# Altium PCB DDS.PcbDoc
Units mm, origin at the board's own origin, x right, y up, seen from the top; angles counter-clockwise.
Board outline 71 x 92 mm, 4 copper layers (Top Layer, Signal Layer 1, Signal Layer 2, Bottom Layer), stack 0.778 mm thick; 120 components, 69 nets, 365 pads, 91 vias.
Unrouted connection lines stored in the file: 89.
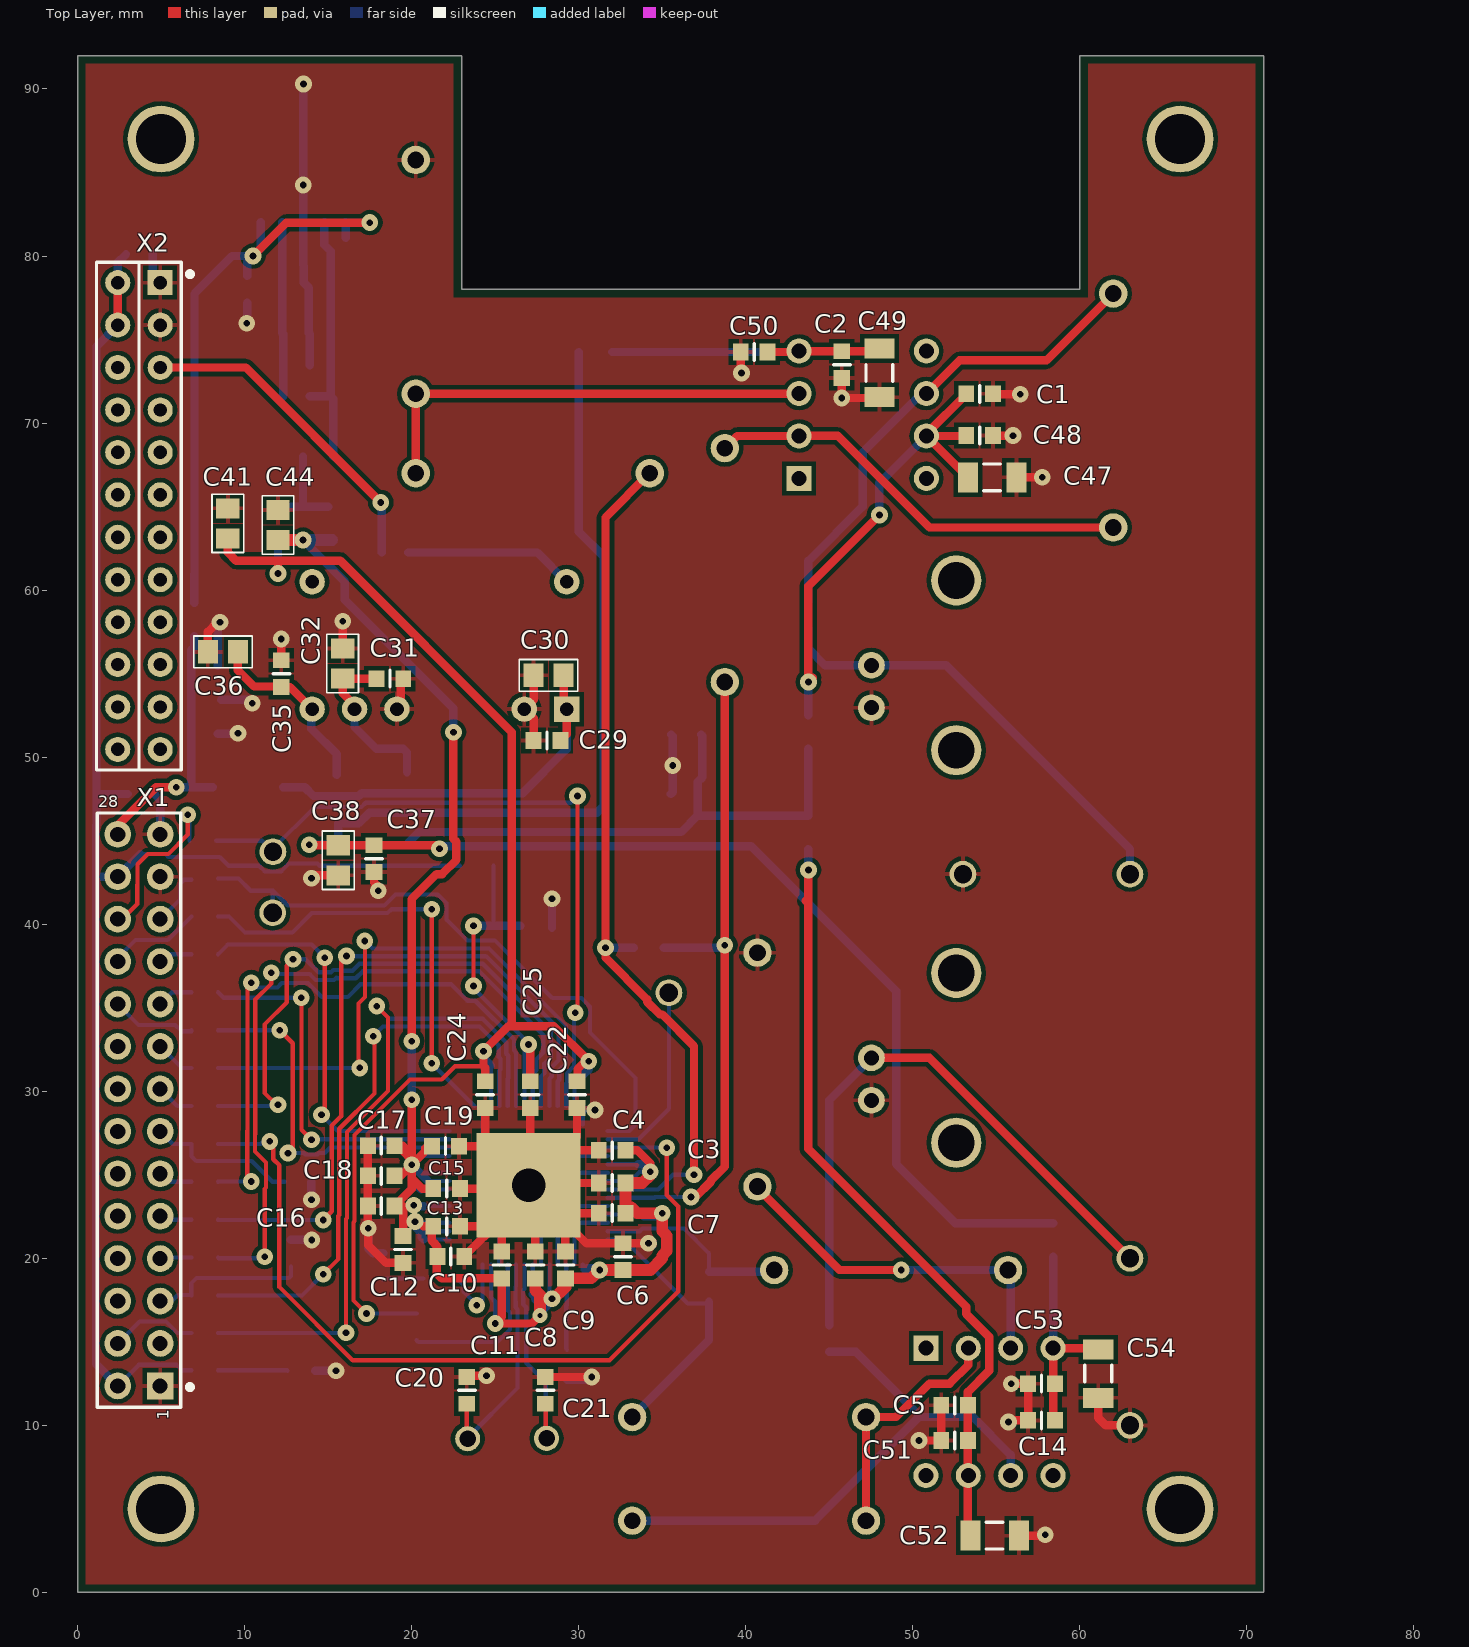
[diagram p0: Top Layer view]
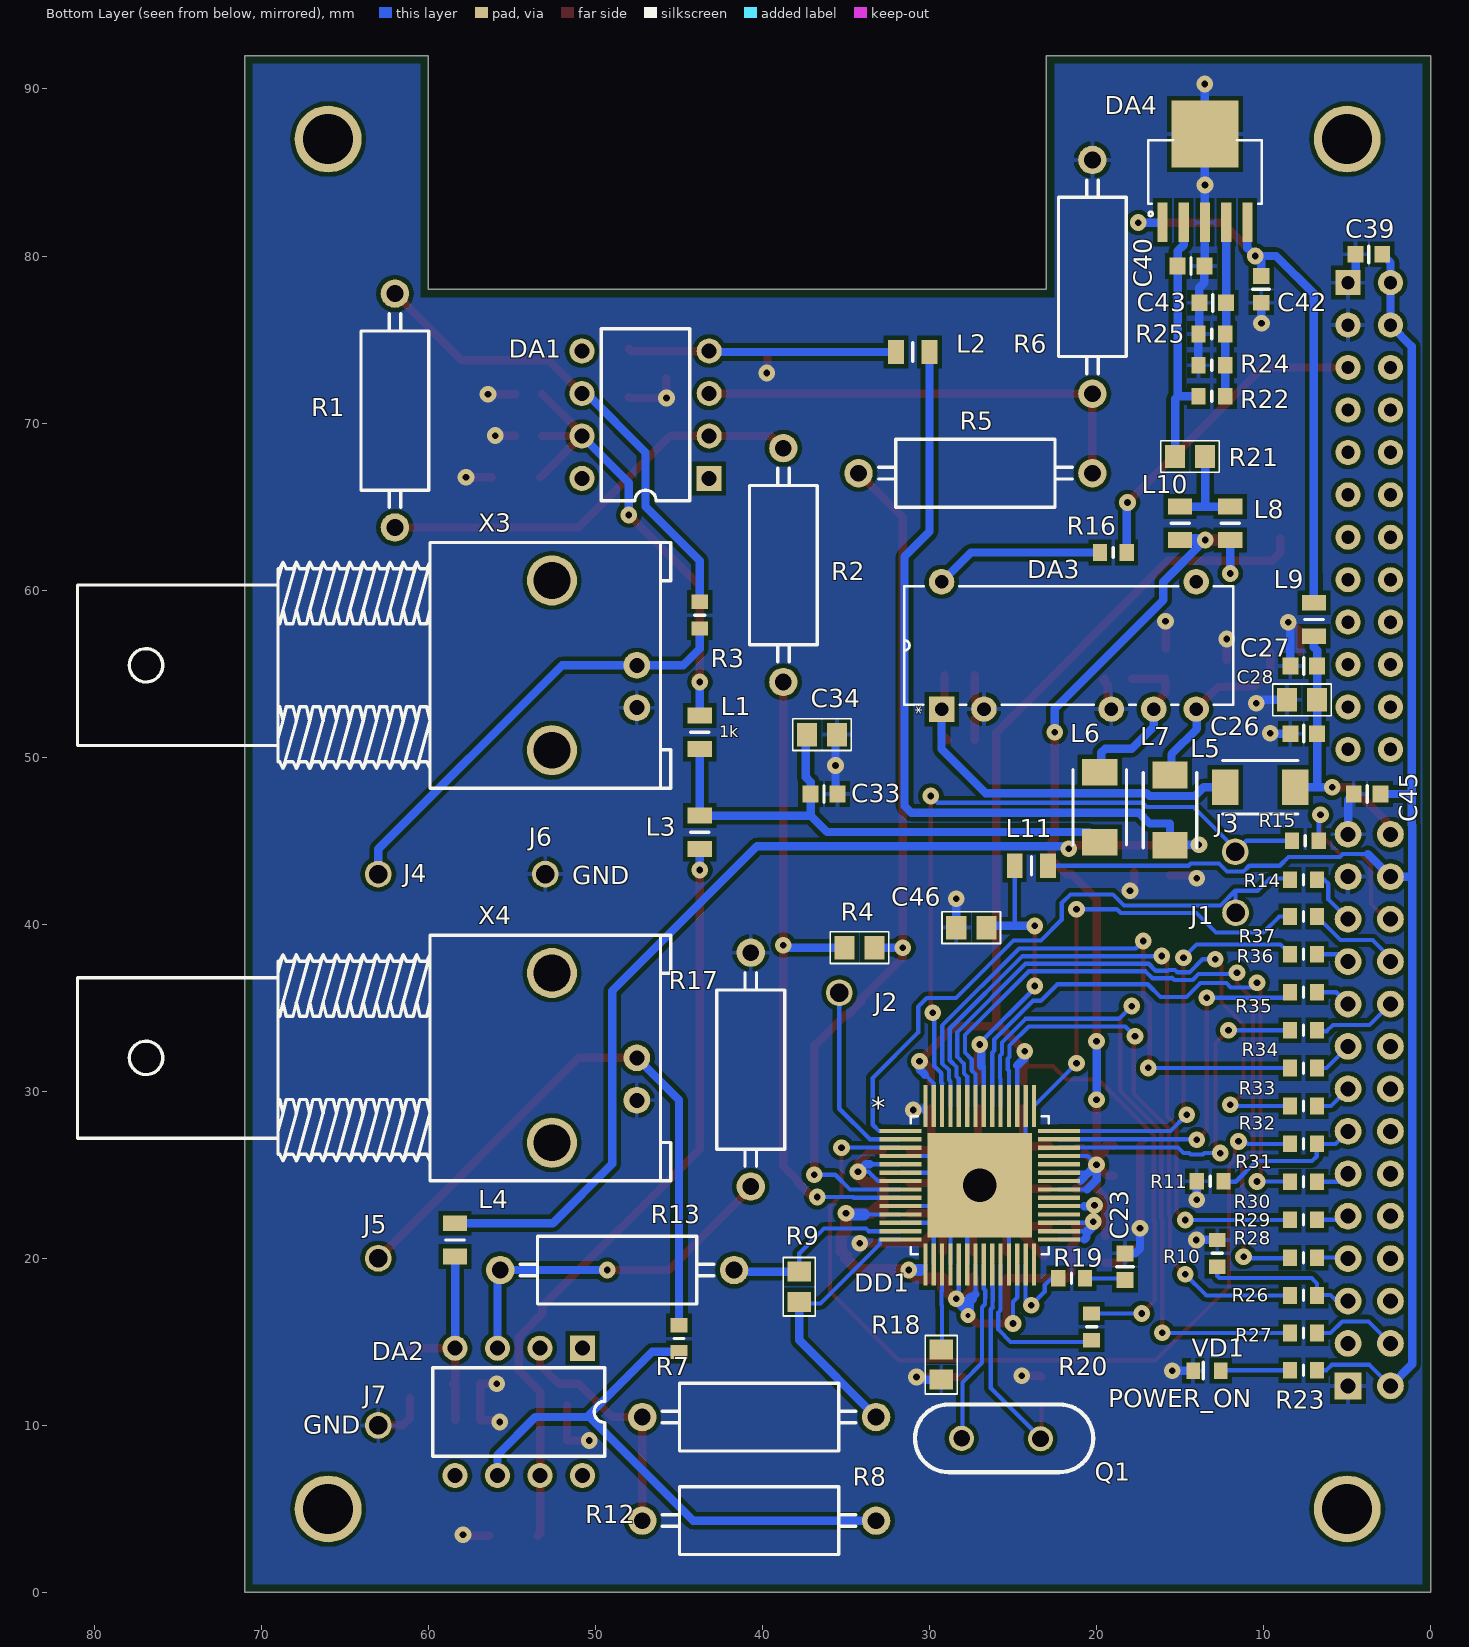
[diagram p1: Bottom Layer view, seen from below]
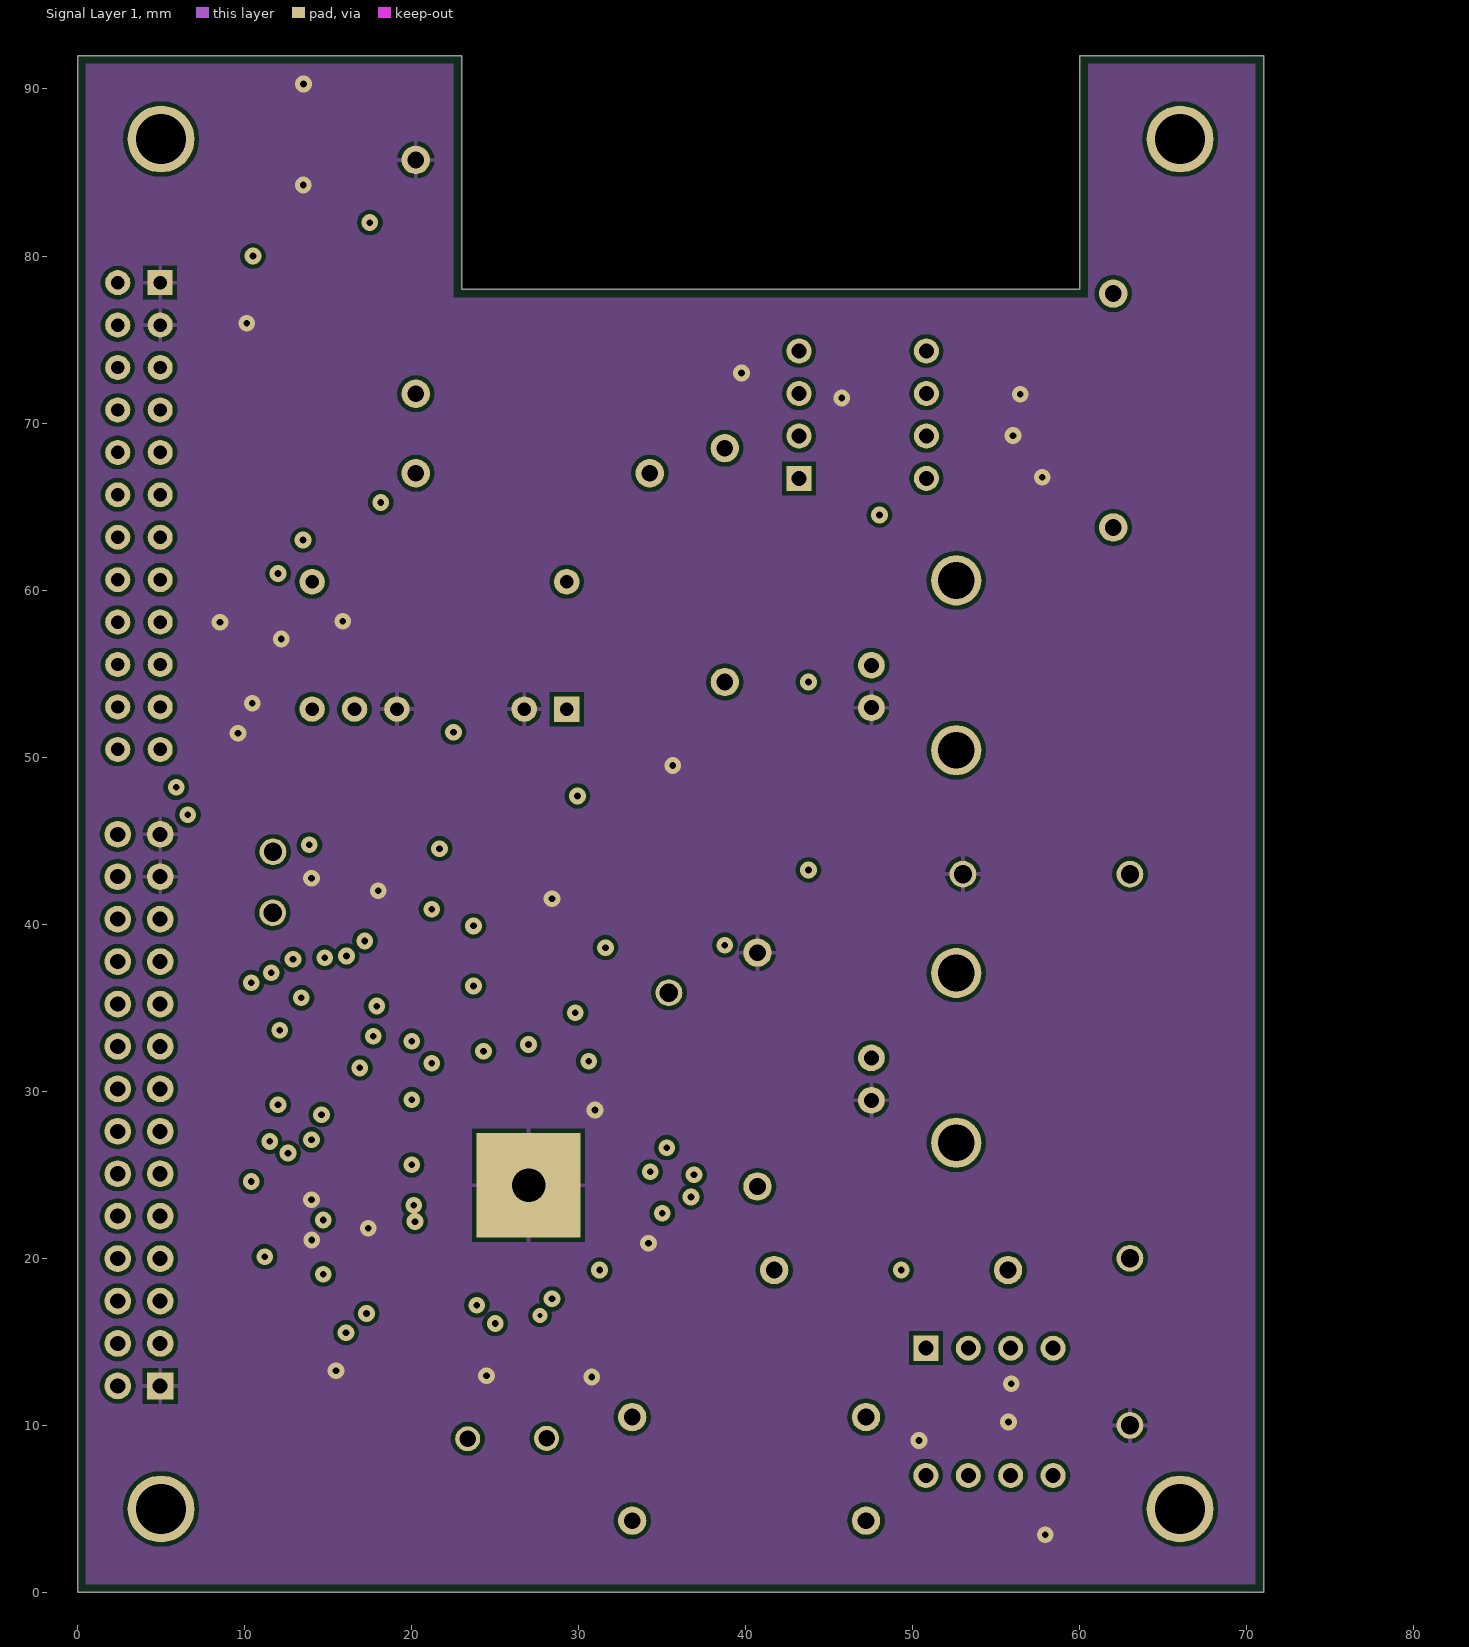
[diagram p2: Signal Layer 1]
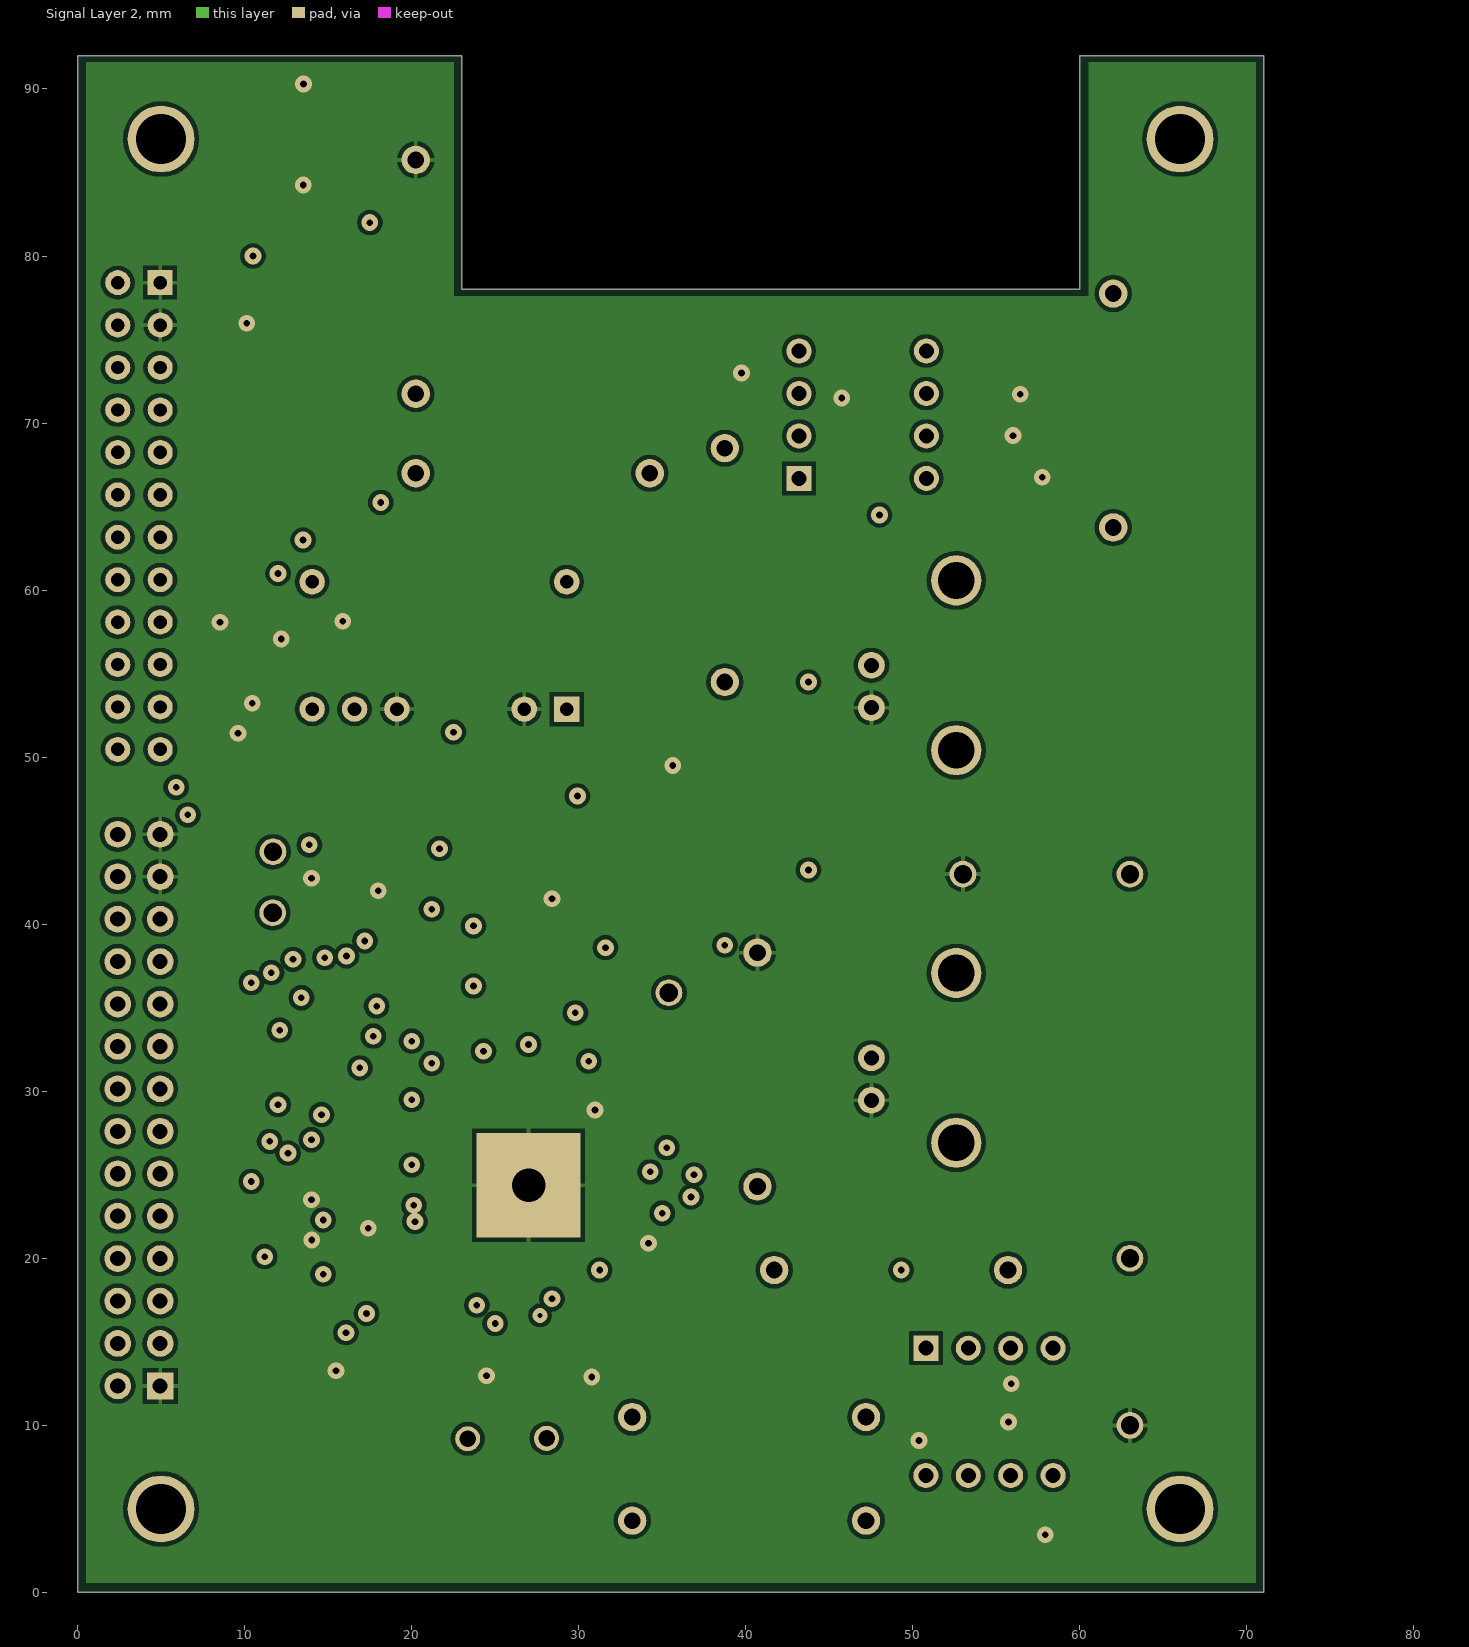
[diagram p3: Signal Layer 2]

## Layer stack, top to bottom
Top Solder: solder mask 0.0102, Solder Resist, Dk 3.5
Top Layer: signal copper 0.0356
Dielectric 1: core 0.254, FR-4, Dk 4.2
Signal Layer 1: signal copper 0.036
Dielectric 3: prepreg 0.127, Dk 4.2
Signal Layer 2: signal copper 0.036
Dielectric 2: core 0.254, Dk 4.2
Bottom Layer: signal copper 0.0356
Bottom Solder: solder mask 0.0102, Solder Resist, Dk 3.5

## Board outline
0,0 0,92 23,92 23,78 60,78 60,92 71,92 71,0

## Design rules (kind name [scope] priority, off if disabled: settings)
Clearance TopOverlay [OnLayer('Top Overlay') vs OnLayer('Top Layer')] p1: gap=0 ignorepadtopadclearanceinfootprint=FALSE except(0.254: Arc-Text Track-Text SMDPad-Text Via-Text Text-Text Text-Hole)
Clearance MultyBot [OnLayer('Bottom Layer') vs OnLayer('Multi-Layer')] p2: gap=0.254 ignorepadtopadclearanceinfootprint=FALSE except(0: Arc-Hole Track-Hole SMDPad-Hole THPad-Hole Via-Hole Fill-Hole Poly-Hole Region-Hole Text-Hole; 0.15: SMDPad-SMDPad; 0.2: Arc-Arc Arc-Track Arc-SMDPad Track-Track Track-SMDPad)
Clearance MultyTop [OnLayer('Multi-Layer')] p3: gap=0.254 ignorepadtopadclearanceinfootprint=FALSE except(0: Arc-Hole Track-Hole SMDPad-Hole THPad-Hole Via-Hole Fill-Hole Poly-Hole Region-Hole Text-Hole; 0.15: SMDPad-SMDPad; 0.2: Arc-Arc Arc-Track Arc-SMDPad Track-Track Track-SMDPad)
Clearance MulyMulty [OnLayer('Multi-Layer') vs OnLayer('Multi-Layer')] p4: gap=0.254 ignorepadtopadclearanceinfootprint=FALSE except(0: Arc-Hole Track-Hole SMDPad-Hole THPad-Hole Via-Hole Fill-Hole Poly-Hole Region-Hole Text-Hole; 0.2: Arc-Arc Arc-Track Arc-SMDPad Track-Track Track-SMDPad SMDPad-SMDPad)
Clearance TopTop [OnLayer('Top Layer') vs OnLayer('Top Layer')] p5: gap=0.254 ignorepadtopadclearanceinfootprint=FALSE except(0: Arc-Hole Track-Hole SMDPad-Hole THPad-Hole Via-Hole Fill-Hole Poly-Hole Region-Hole Text-Hole; 0.2: Arc-Arc Arc-Track Arc-SMDPad Track-Track Track-SMDPad SMDPad-SMDPad)
Clearance BotBot [OnLayer('Bottom Layer') vs OnLayer('Bottom Layer')] p6: gap=0.254 ignorepadtopadclearanceinfootprint=FALSE except(0: Arc-Hole Track-Hole SMDPad-Hole THPad-Hole Via-Hole Fill-Hole Poly-Hole Region-Hole Text-Hole; 0.15: SMDPad-SMDPad; 0.2: Arc-Arc Arc-Track Arc-SMDPad Track-Track Track-SMDPad)
HoleSize [All] p1: absolutevalues=TRUE maxlimit=4 minlimit=0.025 maxpercent=80.000 minpercent=20.000
PlaneConnect [All] p1: pad.planeconnectstyle=Relief pad.reliefexpansion=0.508 pad.reliefentries=4 pad.reliefconductorwidth=0.254 pad.reliefairgap=0.254 via.planeconnectstyle=Direct via.reliefexpansion=0.508 via.reliefentries=4 via.reliefconductorwidth=0.254 via.reliefairgap=0.254
PolygonConnect [All] p1: thpad.connectstyle=Relief thpad.reliefconductorwidth=0.254 thpad.reliefentries=4 thpad.polygonreliefangle="90 Angle" thpad.airgapwidth=0.254 smdpad.connectstyle=Relief smdpad.reliefconductorwidth=0.254 smdpad.reliefentries=4 smdpad.polygonreliefangle="90 Angle" smdpad.airgapwidth=0.254 via.connectstyle=Direct via.reliefconductorwidth=0.254 via.reliefentries=4 via.polygonreliefangle="90 Angle" via.airgapwidth=0.254
RoutingVias [All] p1: holewidth=0.4 width=1 viastyle="Through Hole" minholewidth=0.3 minwidth=0.9 maxholewidth=0.4 maxwidth=1
SolderMaskExpansion [All] p1: expansion=0.102
Width [All] p1: maxlimit=0.7 minlimit=0.2 preferedwidth=0.254 midlayer1_minwidth=0.254 midlayer1_maxwidth=0.254 midlayer2_minwidth=0.254 midlayer2_maxwidth=0.254 minimp=50.000000 maximp=50.000000 favimp=50.000000
28 further rules are at their usual default settings.

## Components (designator, comment, footprint, x,y, rotation, side; value= is the part's Value field where it differs from the comment)
C1 "100nF" CAPC1608X87N 54,71.75 r180 top
C2 "100nF" CAPC1608X87N 45.75,73.5 r90 top
C3 "100nF" CAPC1608X87N 31.998,24.509 r180 top
C4 "100nF" CAPC1608X87N 31.998,26.462 r180 top
C5 "100nF" CAPC1608X87N 52.5,11.2 r0 top
C6 "100nF" CAPC1608X87N 32.65,20.1 r90 top
C7 "100nF" CAPC1608X87N 31.998,22.704 r180 top
C8 "100nF" CAPC1608X87N 27.4,19.604 r90 top
C9 "100nF" CAPC1608X87N 29.204,19.604 r90 top
C10 "100nF" CAPC1608X87N 22.346,20.112 r0 top
C11 "100nF" CAPC1608X87N 25.394,19.604 r90 top
C12 "100nF" CAPC1608X87N 19.488,20.529 r270 top
C13 "100nF" CAPC1608X87N 22.092,21.916 r0 top
C14 "100nF" CAPC1608X87N 57.7,10.3 r0 top
C15 "100nF" CAPC1608X87N 22.092,24.176 r0 top
C16 "100nF" CAPC1608X87N 18.18,23.134 r180 top
C17 "100nF" CAPC1608X87N 18.18,26.742 r180 top
C18 "100nF" CAPC1608X87N 18.18,24.938 r180 top
C19 "100nF" CAPC1608X87N 22.028,26.716 r0 top
C20 "39pF" CAPC1608X87N 23.3,12.1 r270 top
C21 "39pF" CAPC1608X87N 28,12.1 r270 top
C22 "100nF" CAPC1608X87N 29.9,29.8 r270 top
C23 "680pF" CAPC1608X87N 18.3,19.5 r270 bottom
C24 "100nF" CAPC1608X87N 24.4,29.8 r270 top
C25 "100nF" CAPC1608X87N 27.1,29.8 r270 top
C26 "100nF" CAPC1608X87N 7.6,51.404 r180 bottom
C27 "100nF" CAPC1608X87N 7.6,55.463 r180 bottom
C28 "10uF" SMD0805CAP 8.702,53.432 r180 bottom
C29 "100nF" CAPC1608X87N 28.1,51 r0 top
C30 "10uF" SMD0805CAP 27.198,54.898 r0 top
C31 "100nF" CAPC1608X87N 18.7,54.7 r180 top
C32 "10uF" SMD0805CAP 15.869,56.602 r270 top
C33 "100nF" CAPC1608X87N 36.316,47.798 r0 bottom
C34 "10uF" SMD0805CAP 35.43,51.356 r0 bottom
C35 "100nF" CAPC1608X87N 12.2,55 r270 top
C36 "10uF" SMD0805CAP 7.698,56.298 r0 top
C37 "100nF" CAPC1608X87N 17.75,43.925 r90 top
C38 "10uF" SMD0805CAP 15.606,42.827 r90 top
C39 "100nF" CAPC1608X87N 3.7,80.1 r180 bottom
C40 "100nF" CAPC1608X87N 14.35,79.4 r0 bottom
C41 "0.1uF" SMD0805CAP 9,65 r270 top
C42 "100nF" CAPC1608X87N 10.15,78 r90 bottom
C43 "10nF" CAPC1608X87N 13.05,77.2 r180 bottom
C44 "0.1uF" SMD0805CAP 11.998,64.902 r270 top
C45 "100nF" CAPC1608X87N 3.804,47.798 r180 bottom
C46 "20.0uF" SMD0805CAP 28.502,39.798 r180 bottom
C47 "10uF" CAPC1206 54.75,66.75 r180 top
C48 "1nF" CAPC1608X87N 54,69.25 r180 top
C49 "10uF" CAPC1206 48,73 r90 top
C50 "1nF" CAPC1608X87N 40.5,74.25 r0 top
C51 "1nF" CAPC1608X87N 52.5,9.1 r180 top
C52 "10uF" CAPC1206 54.9,3.4 r0 top
C53 "1nF" CAPC1608X87N 57.7,12.5 r180 top
C54 "10uF" CAPC1206 61.1,13.1 r270 top
DA1 "LM6171" DIP8-300 47,70.5 r0 bottom
DA2 "LM6171" DIP8-300 54.59,10.81 r270 bottom
DA3 "DCP010507" NVA7 14.041,60.498 r90 bottom
DA4 "REG104GA3V3" SOT223_6-127 13.512,85.02 r180 bottom value=3V3
DD1 "AD9958BCPZ" CP_56_1_ADI-M 26.997,24.378 r180 bottom
J1 "PLS1" PLS1 11.678,40.686 r180 bottom
J2 "PLS1" PLS1 35.4,35.9 r180 bottom
J3 "PLS1" PLS1 11.7,44.336 r180 bottom
J4 "PLS1" PLS1 63,43 r180 bottom
J5 "PLS1" PLS1 63,20 r180 bottom
J6 "PLS1" PLS1 53,43 r180 bottom
J7 "PLS1" PLS1 63,10 r180 bottom
L1 "1k" RESC2012X50N 43.75,51.5 r90 bottom
L2 "1k" RESC2012X50N 31,74.25 r0 bottom
L3 "1k" RESC2012X50N 43.75,45.5 r270 bottom
L4 "1k" RESC2012X50N 58.4,21.1 r270 bottom
L5 "INDM4532X340N" INDM4532X340N 10.2,48.2 r0 bottom
L6 "INDM4532X340N" INDM4532X340N 19.809,47 r270 bottom
L7 "INDM4532X340N" INDM4532X340N 15.604,46.829 r270 bottom
L8 "1k" RESC2012X50N 12,64 r270 bottom
L9 "1k" RESC2012X50N 6.99,58.242 r90 bottom
L10 "1k" RESC2012X50N 15,64 r270 bottom
L11 "1k" RESC2012X50N 23.9,43.5 r0 bottom
Q1 "KX-3HT  25 MHz" HC49_S 28.079,9.225 r270 bottom
R1 "?" RES_VISHAY_CMF60 62,70.75 r90 bottom
R2 "?" RES_VISHAY_CMF60 38.75,61.5 r90 bottom
R3 "51" RESC1608X64N 43.75,58.5 r90 bottom
R4 "100" SMD0805RES 33.198,38.602 r0 bottom
R5 "?" RES_VISHAY_CMF60 27.25,67 r180 bottom
R6 "?" RES_VISHAY_CMF60 20.25,78.75 r90 bottom
R7 "?" RES_VISHAY_CMF60 40.2,10.5 r0 bottom
R8 "?" RES_VISHAY_CMF60 40.2,4.3 r180 bottom
R9 "100" SMD0805RES 37.802,19.302 r270 bottom
R10 "10k" RESC1608X64N 12.775,20.3 r270 bottom
R11 "10k" RESC1608X64N 13.2,24.607 r180 bottom
R12 "51" RESC1608X64N 45,15.2 r270 bottom
R13 "?" RES_VISHAY_CMF60 48.7,19.3 r0 bottom
R14 "1k" RESC1608X64N 7.614,42.658 r180 bottom (schematic designator R38)
R15 "1k" RESC1608X64N 7.5,45 r180 bottom (schematic designator R39)
R16 "1k" RESC1608X64N 19,62.25 r180 bottom (schematic designator R40)
R17 "?" RES_VISHAY_CMF60 40.7,31.3 r90 bottom
R18 "1k91" SMD0805RES 29.298,12.633 r90 bottom
R19 "680" RESC1608X64N 21.5,18.8 r0 bottom
R20 "10k" RESC1608X64N 20.3,15.9 r90 bottom
R21 "0" SMD0805RES 15.402,67.998 r180 bottom
R22 "10k" RESC1608X64N 13.1,71.6 r0 bottom
R23 "3k" RESC1608X64N 7.614,13.306 r180 bottom
R24 "51k" RESC1608X64N 13.1,73.467 r180 bottom
R25 "51k" RESC1608X64N 13.1,75.333 r180 bottom
R26 "1k" RESC1608X64N 7.614,17.781 r180 bottom
R27 "1k" RESC1608X64N 7.614,15.531 r180 bottom
R28 "1k" RESC1608X64N 7.614,20.044 r180 bottom
R29 "1k" RESC1608X64N 7.614,22.313 r180 bottom
R30 "1k" RESC1608X64N 7.614,24.582 r180 bottom
R31 "1k" RESC1608X64N 7.614,26.851 r180 bottom
R32 "1k" RESC1608X64N 7.614,29.121 r180 bottom
R33 "1k" RESC1608X64N 7.614,31.39 r180 bottom
R34 "1k" RESC1608X64N 7.614,33.659 r180 bottom
R35 "1k" RESC1608X64N 7.614,35.928 r180 bottom
R36 "1k" RESC1608X64N 7.614,38.197 r180 bottom
R37 "1k" RESC1608X64N 7.614,40.466 r180 bottom
VD1 "POWER_ON" LED0603 13.623,13.275 r180 bottom
X1 "PLD28" PLD28 3.677,28.875 r90 top locked
X2 "PBD24" PBD24 4.947,63.165 r270 top locked
X3 "BNC_A" TYCO_1-1337542-0 53,55.5 r0 bottom
X4 "BNC_A" TYCO_1-1337542-0 53,32 r0 bottom

## Footprints (in the part's own frame and the unit in brackets; to place one, negate y for a bottom-side part, rotate by r counter-clockwise, add the part's x,y. Pads: shape width x height; smd on the part's side, far side on the other; paste and mask are expansions set on the pad)
CAPC1206 [mm] "Chip Capacitor, Body 3.2x1.6mm, IPC Medium Density"
  rect 1.2x1.8 smd: 1(-1.45,0) 2(1.45,0)
  silkscreen extent -0.5,-0.8 0.5,0.8, body extent -1.7,-0.9 1.7,0.9, height 0.7
CAPC1608X87N [mm] "Chip Capacitor, Body 1.6x0.8mm IPC Medium Density"
  rect 0.95x1 smd: 1(-0.8,0) 2(0.8,0)
  silkscreen extent 0,-0.5 0,0.5, body extent -0.87,-0.47 0.88,0.48, height 0.87
CP_56_1_ADI-M [mm] "LFCSP 56 0.5mm pitch 8x8x0.8mm body size"
  rect 2.508x0.255 smd paste+0 mask+0: 1(-4.747,3.25) 2(-4.747,2.75) 3(-4.747,2.25) 4(-4.747,1.75) 5(-4.747,1.25) 6(-4.747,0.75) 7(-4.747,0.25) 8(-4.747,-0.25) 9(-4.747,-0.75) 10(-4.747,-1.25) 11(-4.747,-1.75) 12(-4.747,-2.25) 13(-4.747,-2.75) 14(-4.747,-3.25) 29(4.747,-3.25) 30(4.747,-2.75) 31(4.747,-2.25) 32(4.747,-1.75) 33(4.747,-1.25) 34(4.747,-0.75) 35(4.747,-0.25) 36(4.747,0.25) 37(4.747,0.75) 38(4.747,1.25) 39(4.747,1.75) 40(4.747,2.25) 41(4.747,2.75) 42(4.747,3.25)
  rect 0.255x2.508 smd paste+0 mask+0: 15(-3.25,-4.747) 16(-2.75,-4.747) 17(-2.25,-4.747) 18(-1.75,-4.747) 19(-1.25,-4.747) 20(-0.75,-4.747) 21(-0.25,-4.747) 22(0.25,-4.747) 23(0.75,-4.747) 24(1.25,-4.747) 25(1.75,-4.747) 26(2.25,-4.747) 27(2.75,-4.747) 28(3.25,-4.747) 43(3.25,4.747) 44(2.75,4.747) 45(2.25,4.747) 46(1.75,4.747) 47(1.25,4.747) 48(0.75,4.747) 49(0.25,4.747) 50(-0.25,4.747) 51(-0.75,4.747) 52(-1.25,4.747) 53(-1.75,4.747) 54(-2.25,4.747) 55(-2.75,4.747) 56(-3.25,4.747)
  rect 6.248x6.248 hole 2 paste-3.111 mask+0: 57(0,0)
  silkscreen extent -4.13,-4.13 4.13,4.13, body extent -4,-4 4,4, height 0.99
DIP8-300 [mm] "DIP 8 Leads, Row Spacing 7.62 mm; Pitch 2.54 mm"
  rect 1.5x1.5 hole 0.9: 1(-3.81,3.81)
  round 1.5 hole 0.9: 2(-3.81,1.27) 3(-3.81,-1.27) 4(-3.81,-3.81) 5(3.81,-3.81) 6(3.81,-1.27) 7(3.81,1.27) 8(3.81,3.81)
  silkscreen extent -2.65,-5.15 2.65,5.15, body extent -3.93,-5.08 3.94,5.08, height 5.33
HC49_S [mm] "HC-49/U-S Leaded Cristal, Body 11.5x4.66mm; Pitch 4.88mm"
  round 1.5 hole 1: 1(0,0) 2(0.025,4.724)
  silkscreen extent -2.03,-2.79 2.03,7.87, body extent -2.35,-3.45 2.31,8.05, height 3.5
INDM4532X340N [mm] "Inductor, Molded Body; 4.5mm L X 3.2mm W, IPC Medium Density"
  rect 1.6x2.1 smd: 1(-2.1,0) 2(2.1,0)
  silkscreen extent -2.25,-1.6 2.25,1.6, body extent -2.25,-1.6 2.25,1.6, height 3.4
LED0603 [mm] "Chip LED 0603, Body 2.25x1mm"
  rect 0.8x1 smd: 1(-0.6,0) 2(1.05,0)
  silkscreen extent 0,-0.5 0,0.5, body extent -0.67,-0.48 1.22,0.48, height 0.95
NVA7 [mil]
  rect 60x60 hole 32: 1(-300,600)
  round 60 hole 32: 2(-300,500) 5(-300,200) 6(-300,100) 7(-300,0) 8(0,0) 14(0,600)
  silkscreen extent -290,-88 -10,687, body extent -305,-87 15,687, height 215
PBD24 [mm] "2.54mm (.100\") Pitch, 24 Circuits  Dual Row  Top Entry Through Mount Receptacle"
  rect 1.5x1.5 hole 0.8: 1(-15.24,0)
  round 1.5 hole 0.8: 2(-15.24,-2.54) 3(-12.7,0) 4(-12.7,-2.54) 5(-10.16,0) 6(-10.16,-2.54) 7(-7.62,0) 8(-7.62,-2.54) 9(-5.08,0) 10(-5.08,-2.54) 11(-2.54,0) 12(-2.54,-2.54) 13(0,0) 14(0,-2.54) 15(2.54,0) 16(2.54,-2.54) 17(5.08,0) 18(5.08,-2.54) 19(7.62,0) 20(7.62,-2.54) 21(10.16,0) 22(10.16,-2.54) 23(12.7,0) 24(12.7,-2.54)
  silkscreen extent -16.47,-3.81 13.93,1.93, body extent -16.47,-3.81 13.93,1.27, height 7
PLD28 [mm] "28 Contacts - Pitch 2.54mm - Dual Row Straight Strip Header - Insulator 1.7mm"
  rect 1.6x1.6 hole 0.9: 1(-16.51,-1.27)
  round 1.6 hole 0.9: 2(-16.51,1.27) 3(-13.97,-1.27) 4(-13.97,1.27) 5(-11.43,-1.27) 6(-11.43,1.27) 7(-8.89,-1.27) 8(-8.89,1.27) 9(-6.35,-1.27) 10(-6.35,1.27) 11(-3.81,-1.27) 12(-3.81,1.27) 13(-1.27,-1.27) 14(-1.27,1.27) 15(1.27,-1.27) 16(1.27,1.27) 17(3.81,-1.27) 18(3.81,1.27) 19(6.35,-1.27) 20(6.35,1.27) 21(8.89,-1.27) 22(8.89,1.27) 23(11.43,-1.27) 24(11.43,1.27) 25(13.97,-1.27) 26(13.97,1.27) 27(16.51,-1.27) 28(16.51,1.27)
  silkscreen extent -17.78,-3.2 17.78,2.5, body extent -17.78,-3 17.78,2.5, height 8
PLS1 [mm]
  round 1.6 hole 1.1: 1(0,0)
RES_VISHAY_CMF60 [mm] "Resistor, Axial, Pad spacing 13 mm - Body Lengh 8.74mm X Body Diameter 3.68mm"
  round 1.7 hole 1: 1(-7,0) 2(7,0)
  silkscreen extent -5.8,-2.03 5.8,2.03, body extent -7.34,-2.03 7.35,2.03, height 4.06
RESC1608X64N [mm] "Chip Resistor, EIA 0603, Metric 1608, Body 1.6x0.8mm, IPC Medium Density"
  rect 0.85x1 smd: 1(-0.8,0) 2(0.8,0)
  silkscreen extent 0,-0.3 0,0.3, body extent -0.87,-0.47 0.88,0.48, height 0.64
RESC2012X50N [mm] "Chip Resistor, EIA 0805, Metric 2012, Body 2.0x1.25mm, IPC Medium Density"
  rect 0.95x1.45 smd: 1(-1,0) 2(1,0)
  silkscreen extent 0,-0.55 0,0.55, body extent -1.1,-0.67 1.1,0.68, height 0.5
SMD0805CAP [mm] "Чипконденсатор, 2.0x1.3mm"
  rect 1.2x1.4 smd: 1(0.102,0.002) 2(1.902,0.002)
  silkscreen extent -0.75,-0.95 2.75,0.95, body extent -0.02,-0.67 2.08,0.68, height 0.9
SMD0805RES [mm] "Чипрезистор, 2.0x1.3mm"
  rect 1.2x1.4 smd: 1(0.102,0.002) 2(1.902,0.002)
  silkscreen extent -0.75,-0.95 2.75,0.95, body extent 0,-0.63 2,0.63, height 0.51
SOT223_6-127 [mil] "1.27mm pitch 20pin = DCQ6-M(ti)"
  rect 24x93 smd paste+0 mask+0: 1(-100,-118.5) 2(-50,-118.5) 3(0,-118.5) 4(50,-118.5) 5(100,-118.5)
  rect 157.48x157.48 smd: 6(0,90)
  silkscreen extent -134,-103 134,75, body extent -129,-143 129,143, height 71
TYCO_1-1337542-0 [mm] "50 Ohms  BNC Elbow PCB Socket With Mounting Posts"
  round 3 hole 2.2: 0(-0.4,-5.08) 0(-0.4,5.08)
  round 1.6 hole 0.9: 1(-5.48,0) 2(-5.48,2.54)
  silkscreen extent -7.5,-7.35 28,7.35, body extent -7.5,-7.35 28,7.35, height 13.16

## Part data
C1 C2 C3 C4 C5 C6 C7 C8 C9 C10 C11 C12 C13 C14 C15 C16 C17 C18 C19 C20 C21 C22 C23 C24 C25 C26 C27 C29 C31 C33 C35 C37 C39 C40 C42 C43 C45: library part C0603, "Чип конденсатор 0603", DielectricType=Y5V, Voltage=50V, Price=2, SolderOption=Norm, Tol=20%, Vendor=Generic
C28 C30 C32 C34 C36 C38 C41 C44: library part C0805, "Чип конденсатор 0805", DielectricType=Y5V, Voltage=50V, Price=2, SolderOption=Norm, Tol=20%, Vendor=Generic
C46: library part C0805, "Чип конденсатор 0805", DielectricType=Y5V, Voltage=20V, Price=2, SolderOption=Norm, Tol=20%, Vendor=Generic
C47 C49 C52 C54: library part C1206, "Чип конденсатор 0805", DielectricType=Y5V, Voltage=25V, Price=2, SolderOpton=Norm, Tol=20%, Vendor=Generic
C48 C50 C51 C53: library part C0603, "Чип конденсатор 0603", DielectricType=NP0, Voltage=50V, Price=2, SolderOption=Norm, Tol=20%, Vendor=Generic
DA1 DA2: "No Description Available", Manufacturer="Texas Instruments", Manufacturer_Part_Number=LM6171BIN/NOPB, MountType=SMT, PackageReference=P0008A
DA3: "DC/DC 5V to isolated +-7V", Copyright="Copyright (C) 2022 Ultra Librarian. All rights reserved.", Price=1000, Vendor="Texas Instruments"
DA4: library part REG104GA, "Positive LDO Linear stabilizer", Package=SOT223-6, Device=REG104GA, Unit Price=6, Vendor="Texas Instruments"
DD1: "2х канальный   500 MSpS  DDS", Voltage="Core:1V8 IO:3V3", Price=2500, SolderOption=DEV, Vendor="Analog Devices Inc"
J1 J2 J3 J4 J5 J6 J7: "Штырь PLS1", Price=1, SolderOption=Norm
L1 L2 L3 L4 L8 L9 L10 L11: library part BLM21, "SMD Ferrite bead 0805", Package=SMD0805, Device=BLM21, Unit Price=0.1, Vendor=Vishay
L5 L6 L7: "SMD Дроссель", Inductance=220uH, Curent=0.5A, Price=100, Vendor=Sumida
Q1: library part KX-3HT, "Резонатор кварцевый", Price=50, SolderOption=Norm, Vendor=Geyer
R1 R2 R5 R6 R7 R8 R13 R17: library part S2-29, "Чип резистор 1206", Tolerance=0.1%, Price=2, SolderOpton=Norm, TC=+-5ppm/C, Vendor=Generic
R3 R10 R11 R12 R14 R15 R16 R19 R20 R22 R23 R24 R25 R26 R27 R28 R29 R30 R31 R32 R33 R34 R35 R36 R37: library part R0603, "Чип резистор 0603", Tolerance=5%, Price=2, SolderOption=Norm, TC=+-100ppm/C, Vendor=Generic
R4 R9 R18 R21: library part R0805, "Чип резистор 0805", Tolerance=5%, Price=2, SolderOpton=Norm, TC=+-100ppm/C, Vendor=Generic
VD1: library part LED0603, "Чип светодиод 0603", Color=Green, Price=20, SolderOpton=Norm, Vendor=KB
X1: "Вилка  PLD 28/2.54", Price=20, SolderOption=Norm, Vendor=Confly
X2: "Розетка  PBD 24/2.54", Price=20, SolderOption=Norm, Vendor=Confly
X3 X4: "BNC розетка", PartNum=TYCO_1-1337542-0, Price=500, SolderOption=Norm, Vendor=TYCO

## Free pads (board coordinates)
  round 4 hole 3: 0(5,5) 0(5,87) 0(66,5) 0(66,87)

## Via types
v1: diameter 1, hole 0.4, Top Layer to Bottom Layer, tented both sides, 90 vias
v2: diameter 0.9, hole 0.3, Top Layer to Bottom Layer, tented both sides, 1 vias

## Nets (pads, with @x,y where several pads share a name; then routed paths per layer and width w, separated by ;. In a path a pad name is that pad's centre, name@x,y a point inside that pad or via, vN(x,y) a via of type N, cw(c..) or ccw(c..) an arc to the next point about the centre after c; other vN are vias at no path point)
1V8A: C3.1 C4.1 C6.1 C7.1 C8.1 C9.1 C10.1 C11.1 C12.1 C13.1 C15.1 C16.1 C17.1 C18.1 C19.1 C44.2 DD1.5 DD1.7 DD1.11 DD1.15 DD1.19 DD1.21 DD1.26 DD1.29 DD1.30 DD1.31 DD1.33 DD1.35 DD1.36 DD1.37 DD1.39 L10.2 | length 131.9
  Top Layer w0.254: 20.7,26.3 20.7,26.628 20.788,26.716 C19.1
  Top Layer w0.5: C18.1 19.338,24.938 v1(20,25.6) ; C17.1 19.458,26.742 19.5,26.7 19.5,26.4 v1@20,25.9 ; C16.1@19.24,23.394 20,24.154 20,24.8 ; C12.1 19.488,22.2 ; 19.5,23.134 19.488,23.121 19.488,22.2 ; v1(20,29.5) v1@20,25.9 ; v1(20,33) 20,41.5 21.5,43 21.825,43 22.675,43.85 22.675,44.937 22.5,45.112 v1(22.5,51.5) ; v1(20.2,22.2) 19.488,22.2 ; 20.684,21.916 C13.1 21.2,21.824 21.2,21.075 21.375,20.9 21.375,20.875 21.546,20.704 C10.1 21.5,20.066 21.5,19.1 21.796,18.804 C11.1 25.394,16.494 v1(25,16.1) 27.2,16.1 v2(27.684,16.584) ; 20.7,26.3 v1(20,25.6) ; C15.1 20.624,24.176 20,24.8 ; C4.1 33.512,26.462 34.278,25.696 v1(34.278,25.177) ; 20,24.8 v1(20,25.6) ; v1(20,25.6) v1@20,25.9
  Top Layer w0.7: C44.2 v1(13.5,63) ; C8.1 27.4,18.1 27.684,17.816 v2(27.684,16.584) ; v1(28.4,17.575) 28.4,17.475 29.204,18.279 C9.1 30.754,18.804 v1(31.25,19.3) 31.35,19.3 C6.1 34.3,19.3 35,20 35,20.164 35.279,20.443 35.279,21.357 35,21.636 v1(35,22.7) 33.494,22.7 33.144,23.05 C7.1 C3.1 33.808,24.509 34.278,24.978 v1(34.278,25.177)
  Bottom Layer w0.254: v1(20,25.6) 20.528,26.128 DD1.39 ; v1(20.2,22.2) v1@20.272,22.128 ; 20.472,25.128 DD1.37 ; 20.572,24.128 DD1.35 ; 20.728,21.128 DD1.29 ; 20.728,23.128 DD1.33 ; 20.972,24.628 DD1.36 ; DD1.30 20.772,21.628 v1@20.272,22.128 ; DD1.31 v1@20.272,22.128 ; DD1.26 24.747,17.653 25,17.4 v1(25,16.1) v1@24.786,16.314 ; 27.247,17.853 DD1.21 ; v1@28.248,17.848 DD1.19 ; DD1.15 30.248,19.303 30.25,19.3 30.525,19.3 ; DD1.11 33.928,22.628 ; DD1.7 33.088,24.628 33.637,25.177 v1(34.278,25.177) ; DD1.5 33.572,25.628
  Bottom Layer w0.5: v1(13.5,63) 16,60.5 16,59.42 22.5,52.92 v1(22.5,51.5) ; v1(20,29.5) v1(20,33) ; v1(20.128,23.172) 20.128,23.128 20.728,23.128 ; v1(20.2,22.2) 20.2,21.9 20.6,21.5 20.6,21.256 20.728,21.128 ; 20.572,24.128 20,24.7 v1(20,25.6) 20.472,25.128 20.972,24.628 ; 27.247,17.853 27.5,17.6 ; 33.572,25.628 33.827,25.628 v1(34.278,25.177)
  Bottom Layer w0.7: v1(13.5,63) L10.2 L10.2@15.25,63 ; 27.5,17.6 27.684,17.416 v2@27.684,16.859 ; v2(27.684,16.584) v2@27.684,16.859 ; v1(28.4,17.575) v2@27.684,16.859 ; 30.525,19.3 v1(31.25,19.3) ; 33.928,22.628 34.928,22.628 v1(35,22.7)
1V8D: C22.1 C24.1 C41.2 DD1.45 DD1.55 L8.2 R20.2 | length 83.9
  Top Layer w0.254: v1(17.3,16.7) 16.519,17.481 16.519,22.165 16.578,22.224 16.578,27.378 19.9,30.7 21.8,30.7 22.6,31.5 24.3,31.5
  Top Layer w0.3: C22.1 C22.1@29.925,30.575
  Top Layer w0.5: C41.2 9.002,62.248 9.5,61.75 12,61.75 ; v1(12,61) 12,61.75 ; C24.1 24.4,31.4 24.3,31.5 v1(24.3,32.4) 25.8,33.9 26,33.9 ; C22.1@29.925,30.575 29.925,31.325 30.4,31.8 v1(30.6,31.8) 28.5,33.9 26,33.9 ; 12,61.75 13.502,61.75 13.516,61.764 15.726,61.764 26,51.49 26,33.9
  Bottom Layer w0.254: v1(17.3,16.7) R20.2 ; DD1.45 24.747,31.547 ; DD1.55 29.747,30.468 30.279,31
  Bottom Layer w0.5: v1(12,61) L8.2 ; v1(24.3,32.4) 24.3,31.995 24.747,31.547 ; 30.279,31 30.6,31.321 v1(30.6,31.8)
3V3: C25.1 C46.2 DD1.49 L11.2 | length 21.6
  Top Layer w0.254: v1@23.426,40.174 v1(23.7,39.9) ; v1(23.7,36.3) v1(23.7,39.9) ; v1(23.7,39.9) 23.7,40 v1(23.7,39.9)
  Top Layer w0.5: v1(27,32.8) 27.1,32.7 C25.1
  Bottom Layer w0.254: v1(23.7,36.3) 23.7,36.172 27,32.872 v1(27,32.8) ; 24.8,39.9 24.9,40 L11.2 ; C46.2@26.5,39.9 C46.2 ; DD1.49 26.748,31.5
  Bottom Layer w0.5: v1(23.7,39.9) 24.8,39.9 C46.2@26.5,39.9 ; 26.9,31.5 26.9,32.7 v1(27,32.8)
3V3_In: C39.2 C45.2 L11.1 R23.2 X1.2 X1.26 X2.2 X2.4 | length 101.5
  Top Layer w0.5: X2.4@2.407,75.882 X2.2
  Bottom Layer w0.254: X1.2 3.667,13.625 5.925,13.625 6.244,13.306 R23.2 ; 3.762,44.2 5.262,44.2 5.436,44.026 8.51,44.026 9.036,43.5 10.865,43.5 11.211,43.155 12.189,43.155 12.666,43.631 14.365,43.631 14.496,43.5 L11.1
  Bottom Layer w0.5: X1.2 1.103,13.669 1.103,42.9 ; C39.2 2.407,79.607 X2.2 X2.4 1.137,74.595 1.137,47.825 ; C45.2 1.164,47.798 1.137,47.825 ; 3.762,44.2 X1.26 1.158,42.845 1.103,42.9 ; 1.103,42.9 1.103,45.925 1.137,45.959 1.137,47.825
5V: C26.2 C27.2 C28.2 L5.1 L9.1 X1.28 | length 16.3
  Top Layer w0.5: X1.28 2.407,45.907 4.7,48.2 v1(5.9,48.2)
  Bottom Layer w0.5: v1(5.9,48.2) 6.8,48.2 ; L9.1 6.99,56.59 6.8,56.4 C27.2 C28.2 C26.2 6.8,48.2 ; L5.1 6.8,48.2
+V: C33.2 C34.2 L1.1 L3.1 L6.2 | length 33.6
  Bottom Layer w0.5: L6.2 20.434,45.525 36.141,45.525 37.116,46.5 ; C34.2 37.4,51.286 37.4,48.8 37.116,48.516 C33.2 37.116,46.5 ; L1.1 L3.1 37.116,46.5
-V: C37.2 C38.2 L2.1 L4.1 L7.2 | length 107.4
  Top Layer w0.5: v1(13.875,44.75) 13.9,44.75 13.921,44.729 C38.2 15.608,44.725 C37.2 21.467,44.725 v1(21.671,44.521)
  Bottom Layer w0.5: v1(13.875,44.75) 15.583,44.75 L7.2 15.604,46.027 16.821,46.027 17.466,46.673 30.339,46.673 30.346,46.68 31.1,46.68 31.5,47.08 31.5,62 30,63.5 L2.1 ; v1@21.75,44.5 21.692,44.5 v1(21.671,44.521) 21.671,44.671 21.675,44.675 40.325,44.675 49,36 49,25.65 52.55,22.1 L4.1
CS_98: R27.2 X1.4 | length 5.2
  Bottom Layer w0.254: X1.4 3.727,16.225 5.297,16.225 5.991,15.531 R27.2
GND: C1.1 C2.1 C3.2 C4.2 C5.1 C6.2 C7.2 C8.2 C9.2 C10.2 C11.2 C12.2 C13.2 C14.1 C15.2 C16.2 C17.2 C18.2 C19.2 C20.1 C21.1 C22.2 C23.1 C24.2 C25.2 C26.1 C27.1 C28.1 C29.1 C30.1 C31.1 C32.1 C33.1 C34.1 C35.1 C36.1 C37.1 C38.1 C39.1 C40.1 C41.1 C42.1 C43.1 C44.1 C45.1 C46.1 C47.1 C48.1 C49.1 C50.1 C51.2 C52.2 C53.2 C54.2 DA3.2 DA3.5 DA4.3 DA4.6 DD1.4 DD1.6 DD1.10 DD1.12 DD1.16 DD1.18 DD1.20 DD1.25 DD1.44 DD1.56 DD1.57 J6.1 J7.1 R6.2 R10.1 R11.1 R17.2 R18.1 R24.1 R25.1 VD1.1 X1.1 X1.25 X1.27 X2.1 X2.3 X3.2 X4.2 | length 187.7
  Top Layer w0.254: C17.2@17.122,27 C17.2
  Top Layer w0.5: C36.1 7.8,57.5 8.35,58.05 8.5,58.05 v1(8.525,58.075) ; v1(14,42.75) 14.179,42.929 C38.1 ; C17.2 C18.2 C16.2 17.38,21.82 v1(17.4,21.8) 17.4,20.8 18.471,19.729 C12.2 ; C37.1 17.75,42.5 18,42.25 v1(18,42) ; C19.2 DD1.57@24.66,26.716 ; C13.2 24.536,21.916 DD1.57@25.394,22.775 ; C15.2 DD1.57@26.795,24.176 ; C10.2 DD1.57@25.394,22.36 ; C20.1 23.375,12.975 v1(24.475,12.975) ; C24.2 24.4,26.976 DD1.57@24.66,26.716 ; C11.2 DD1.57@25.394,22.36 ; C25.2 DD1.57@27.1,24.481 ; C8.2 DD1.57@27.4,23.976 ; C21.1 v1(30.775,12.9) ; C9.2 DD1.57@29.204,22.171 ; C22.2 29.9,27.281 DD1.57@29.081,26.462 ; C7.2 DD1.57@28.671,22.704 ; C3.2 DD1.57@27.128,24.509 ; C4.2 DD1.57@29.081,26.462 ; v1(34.175,20.9) C6.2 30.475,20.9 DD1.57@29.204,22.171 ; C50.1 39.7,73.3 39.75,73.25 v1(39.75,73) ; C2.1 v1(45.75,71.5) 47.95,71.5 C49.1 ; v1(50.375,9.1) C51.2 C5.1 ; C48.1 v1(56,69.25) v1@56.25,69.25 ; C1.1 54.825,71.725 v1(56.425,71.725) ; v1(55.725,10.2) 55.825,10.3 C14.1 C53.2 v1(55.9,12.5) ; C47.1 v1(57.75,66.75) ; C52.2 57.875,3.4 v1(57.925,3.45) ; C54.2 61.1,10.45 61.55,10 J7.1 ; DD1.57@24.66,26.716 DD1.57 ; DD1.57@25.394,22.36 DD1.57@25.394,22.775 ; DD1.57@25.394,22.775 DD1.57@26.795,24.176 ; DD1.57@26.795,24.176 DD1.57 ; DD1.57 DD1.57@27.4,23.976 ; DD1.57 DD1.57@27.1,24.481 ; DD1.57@27.1,24.481 DD1.57@27.128,24.509 ; DD1.57@27.128,24.509 DD1.57@29.081,26.462 ; DD1.57@27.4,23.976 DD1.57@28.671,22.704 ; DD1.57@28.671,22.704 DD1.57@29.204,22.171
  Top Layer w0.508: C35.1 v1(12.2,57.075) ; C32.1 v1(15.871,58.129) v1@15.871,58.146 ; DA3.5 19.121,53.221 19.347,53.447 19.335,53.458 19.335,54.335 19.6,54.6 C31.1 ; C29.1 27.3,52.319 DA3.2 27.3,53.437 C30.1
  Bottom Layer w0.254: DD1.44 24.248,27.128 DD1.57 ; DD1.25 25.248,22.628 DD1.57 ; DD1.20 DD1.57@27.748,23.628 ; DD1.18 DD1.57@28.747,22.628 ; DD1.16 29.747,21.628 DD1.57@29.248,22.128 ; DD1.56@30.248,28.028 DD1.56@30.248,28.648 ; DD1.56 DD1.56@30.248,28.648 ; DD1.56@30.275,29.125 v1@30.525,28.875 ; v1(30.975,28.875) v1@30.525,28.875 ; DD1.12 DD1.57@29.248,22.128 ; DD1.10 DD1.57@28.248,23.128 ; DD1.6 DD1.57@27.748,25.128 ; DD1.4 28.747,26.128 DD1.57@27.748,25.128 ; DD1.57 DD1.57@27.748,23.628 ; DD1.57 DD1.57@27.748,25.128 ; DD1.57@27.748,23.628 DD1.57@28.248,23.128 ; DD1.57@28.248,23.128 DD1.57@28.747,22.628 ; DD1.57@28.747,22.628 DD1.57@29.248,22.128 ; DD1.56@30.248,28.648 30.475,28.875 v1@30.525,28.875
  Bottom Layer w0.5: C26.1 9.579,51.404 v1(9.6,51.425) ; C27.1 8.4,57.95 v1(8.525,58.075) ; C28.1 10.241,53.434 v1(10.45,53.225) ; v1(17.4,21.8) 17.4,20.6 17.7,20.3 C23.1 ; C46.1 v1(28.4,41.525) ; R18.1 30.61,12.735 v1(30.775,12.9) ; C33.1 35.625,47.907 v1(35.625,49.5) 35.625,51.261 C34.1
  Bottom Layer w0.508: C39.1 4.5,78.852 X2.1 ; C45.1 4.947,47.455 X1.27 ; v1(10.125,75.975) 10.15,75.975 C42.1 ; R10.1 v1(14.025,21.1) ; v1@13.512,90.288 DA4.6 v1(13.512,84.25) DA4.3 13.512,79.438 C40.1 13.55,78.4 13.85,78.1 C43.1 13.85,75.383 R25.1 R24.1 ; v1(14,23.5) R11.1@14,24.582 ; VD1.1 v1(15.475,13.275) v1@15.525,13.325
  other v1: 13.524,90.3
IO_UPDATE_99: R10.2 R26.2 X1.5 | length 9.4
  Bottom Layer w0.254: X1.5 5.645,17.445 6,17.8 6.795,17.8 R26.2@6.8,17.795 ; R26.2 R26.2@6.8,17.795 ; R10.2 12.775,18.95 12.65,18.825 7.125,18.825 6.8,18.5 R26.2@6.8,17.795
M_RST__110: R11.2 R31.2 X1.13 | length 9.1
  Bottom Layer w0.254: X1.13 5.701,26.851 R31.2 6.814,26.111 7.1,25.825 10.425,25.825 11.668,24.582 R11.2@12.4,24.582
NetC1_2: C1.2 C47.2 C48.2 DA1.7 L1.2 | length 29.4
  Top Layer w0.5: v1@44,54.75 v1(43.75,54.5) 43.75,60.25 v1(48,64.5) ; C48.2 53.18,69.23 DA1.7@50.82,69.23 ; C1.2 50.81,69.36 DA1.7 DA1.7@50.82,69.23 ; C47.2 DA1.7@50.82,69.23
  Bottom Layer w0.5: L1.2 v1(43.75,54.5) ; v1(48,64.5) 48,66.42 DA1.7
NetC2_2: C2.2 C49.2 C50.2 DA1.4 L2.2 | length 18
  Top Layer w0.5: C50.2 43.13,74.25 DA1.4 43.2,74.3 C2.2 47.85,74.3 C49.2
  Bottom Layer w0.5: L2.2 43.13,74.25 DA1.4
NetC5_2: C5.2 C51.1 C52.1 DA2.7 L3.2 | length 46.4
  Top Layer w0.508: 43.6,41.4 43.75,41.55 ; v1(43.75,43.25) 43.75,41.55 ; C52.1 53.3,3.55 C51.1 C5.2 53.3,12 54.578,13.278 54.578,15.296 53.192,16.682 53.192,17.108 43.75,26.55 43.75,41.55
  Bottom Layer w0.508: v1(43.75,43.25) L3.2
NetC14_2: C14.2 C53.1 C54.1 DA2.4 L4.2 | length 12.5
  Top Layer w0.508: C14.2@58.4,10.3 58.4,12.4 C53.1 ; C53.1@58.4,12.6 DA2.4 61.03,14.62 C54.1
  Bottom Layer w0.508: DA2.4 L4.2
NetC20_2: C20.2 DD1.23 Q1.2 | length 13.9
  Top Layer w0.254: Q1.2@23.3,9.2 C20.2
  Bottom Layer w0.254: Q1.2@23.3,9.2 26.335,12.235 26.335,16.953 26.217,17.071 26.225,17.08 26.225,17.417 26.217,17.425 26.217,18.28 26.25,18.313 26.25,18.5 26.247,18.503 DD1.23
NetC21_2: C21.2 DD1.22 Q1.1 | length 13.1
  Top Layer w0.254: C21.2 28.024,11.276 Q1.1@28.024,9.225
  Bottom Layer w0.254: DD1.22 26.748,18.169 26.671,18.092 26.671,17.614 26.679,17.605 26.679,17.251 26.853,17.077 26.853,13.747 28.024,12.576 Q1.1@28.024,9.225
NetC23_2: C23.2 R19.1 | length 2.4
  Bottom Layer w0.254: C23.2 18.4,18.8 R19.1
NetC29_2: C29.2 C30.2 DA3.1 L5.2 | length 24.9
  Top Layer w0.5: C29.2 29.281,51.381 DA3.1 29.1,53.059 C30.2
  Bottom Layer w0.5: L5.2 13.6,48.2 14.121,47.679 16.841,47.679 17.011,47.85 26.65,47.85 29.281,50.481 DA3.1
NetC31_2: C31.2 C32.2 DA3.6 L6.1 | length 10.2
  Top Layer w0.5: DA3.6 16.581,53.119 15.871,53.829 C32.2 C31.2
  Bottom Layer w0.5: DA3.6 16.581,51.819 17.9,50.5 19.5,50.5 19.721,50.279 L6.1@19.721,49.1
NetC35_2: C35.2 C36.2 DA3.7 L7.1 | length 11.1
  Top Layer w0.5: C36.2 9.6,55.2 10.571,54.229 12.171,54.229 C35.2 12.719,54.2 DA3.7
  Bottom Layer w0.5: DA3.7 14,52.837 14,51.7 15.516,50.184 L7.1@15.516,48.929
NetC40_2: C40.2 DA4.2 R21.1 R22.2 | length 15.5
  Bottom Layer w0.508: R22.2 15.15,71.6 ; DA4.2 14.782,80.668 15.15,80.3 C40.2 15.15,71.6 ; R21.1 15.3,71.45 15.15,71.6
NetC42_2: C42.2 DA4.1 DA4.5 L9.2 | length 36.2
  Top Layer w0.5: v1(10.5,80) 12.5,82 v1(17.5,82)
  Bottom Layer w0.5: L9.2@7,59.252 L9.2 6.99,60.99 7,61 7,77.75 9.25,80 v1(10.5,80) 10.972,80.472 DA4.5 ; C42.2 v1@10.15,79.65 ; DA4.1@16.052,81.098 DA4.1 16.062,82 v1(17.5,82)
NetC43_2: C43.2 DA4.4 R22.1 R24.2 R25.2 | length 10.4
  Bottom Layer w0.508: DA4.4 12.242,77.208 C43.2 12.25,75.383 R25.2 R24.2 R22.1
NetDA1_2: DA1.2 R1.1 R2.2 | length 25.8
  Top Layer w0.5: R2.2 39.48,69.23 DA1.2 43.21,69.25 45.5,69.25 51,63.75 R1.1
NetDA1_3: DA1.3 R5.2 R6.1 | length 27.7
  Top Layer w0.5: R5.2 R6.1 43.17,71.75 DA1.3
NetDA1_6: DA1.6 R1.2 R3.2 | length 29.2
  Top Layer w0.5: DA1.6 52.79,73.75 58,73.75 R1.2
  Bottom Layer w0.5: R3.2 43.75,61.75 47,65 47,68.25 50.52,71.77 DA1.6
NetDA2_2: DA2.2 R7.2 R8.1 | length 15.1
  Top Layer w0.5: R8.1 R7.2 49,10.5 51,12.5 52.2,12.5 53.32,13.62 DA2.2 DA2.2@52.854,14.62
NetDA2_3: DA2.3 R13.2 R17.1 | length 22.2
  Top Layer w0.5: R17.1 40.7,24.2 45.6,19.3 v1(49.3,19.3) ; R13.2 R13.2@55.9,19.1
  Bottom Layer w0.5: v1(49.3,19.3) R13.2 55.86,19.14 DA2.3
NetDA2_6: DA2.6 R8.2 R12.2 | length 34.5
  Bottom Layer w0.5: R8.2 44.155,4.3 50.355,10.5 50.5,10.5 ; R12.2 46.6,14.4 50.5,10.5 ; DA2.6 55.86,8.24 53.6,10.5 50.5,10.5
NetDA3_14: DA3.14 R16.1 | length 10.2
  Bottom Layer w0.5: R16.1 27.529,62.25 DA3.14
NetDD1_1: DD1.1 J1.1 R14.1 | length 37.9
  Top Layer w0.254: J1.1 J1.1@11.689,40.686
  Bottom Layer w0.254: R14.1@8.414,42.735 9.629,42.735 10.364,42 11.7,42 ; J1.1 11.678,41.978 11.7,42 ; DD1.1 33.028,27.628 33.4,28 33.4,30.8 30.681,33.519 30.681,35.065 30.165,35.581 28.419,35.581 24.981,39.019 23.335,39.019 22.081,40.273 22.081,41.265 21.565,41.781 19.027,41.781 18.365,41.119 12.581,41.119 11.7,42
NetDD1_2: DD1.2 J2.1 | length 11.4
  Bottom Layer w0.254: DD1.2 33.572,27.128 35.4,28.956 J2.1
NetDD1_3: DD1.3 R31.1 | length 51.9
  Top Layer w0.254: v1(11.5,27) 11.5,26.8 11.719,26.581 11.719,25.935 12.081,25.573 12.081,18.288 16.469,13.9 31.846,13.9 35.956,18.01 35.956,23.108 35.272,23.792 v1(35.272,26.628)
  Bottom Layer w0.254: R31.1 10.951,26.851 11.1,27 v1(11.5,27) ; DD1.3 v1(35.272,26.628)
NetDD1_8: DD1.8 R4.1 R5.1 | length 52.6
  Top Layer w0.5: R5.1 31.6,64.35 v1(31.6,38.6) 31.6,38 34.096,35.504 34.096,35.36 34.86,34.596 35.004,34.596 36.904,32.696 36.904,25.004 v1(36.9,25)
  Bottom Layer w0.254: DD1.8 33.322,24.128 33.331,24.119 34.765,24.119 35.646,25 36.2,25 v1(36.9,25)
  Bottom Layer w0.5: v1(31.6,38.6) R4.1
NetDD1_9: DD1.9 R2.1 R4.2 | length 40.5
  Top Layer w0.5: v1(36.725,23.675) 36.995,23.675 37.904,24.584 37.904,24.654 38.75,25.5 v1(38.75,38.75) R2.1
  Bottom Layer w0.254: DD1.9 34.535,23.628 34.572,23.665 34.953,23.665 34.963,23.675 v1(36.725,23.675)
  Bottom Layer w0.5: R4.2 38.6,38.6 v1(38.75,38.75)
NetDD1_13: DD1.13 R9.1 R13.1 | length 11.8
  Bottom Layer w0.254: DD1.13 33.657,21.628 33.81,21.781 36.319,21.781 37.8,20.3 R9.1 ; R13.1@41.6,19.2 R13.1
  Bottom Layer w0.5: R9.1 R13.1@41.6,19.2
NetDD1_14: DD1.14 R7.1 R9.2 | length 16.6
  Bottom Layer w0.254: DD1.14 32.972,21.128 32.972,20.857 36.529,17.3 37.7,17.3 R9.2
  Bottom Layer w0.5: R7.1 37.8,15.1 R9.2
NetDD1_17: DD1.17 R18.2 | length 5.1
  Bottom Layer w0.254: DD1.17 29.248,18.053 29.281,18.019 29.281,17.21 29.248,17.177 29.248,14.587 R18.2
NetDD1_24: DD1.24 R20.1 | length 9.9
  Bottom Layer w0.254: R20.1 20.4,15 25.146,15 25.881,15.735 25.881,16.765 25.747,16.898 DD1.24
NetDD1_27: DD1.27 R19.2 | length 5.1
  Bottom Layer w0.254: R19.2 22.7,18.8 23.1,18.4 23.1,18.005 v1(23.905,17.2) 24.152,17.448 24.248,17.448 DD1.27
NetDD1_40: DD1.40 R34.1 | length 22.3
  Top Layer w0.254: v1(12.1,33.659) 12.881,32.878 12.881,26.581 v1(12.6,26.3)
  Bottom Layer w0.254: R34.1 12.441,33.659 v1(12.1,33.659) 12.141,33.659 v1@12.3,33.5 ; v1(12.6,26.3) 13.554,26.3 13.635,26.219 14.365,26.219 14.446,26.3 14.8,26.3 15.128,26.628 DD1.40
NetDD1_41: DD1.41 R35.1 | length 22.1
  Top Layer w0.254: v1(13.4,35.6) 13.4,27.7 v1(14,27.1)
  Bottom Layer w0.254: R35.1 8.742,35.6 v1(13.4,35.6) ; v1(14,27.1) 14.028,27.128 DD1.41
NetDD1_42: DD1.42 R36.1 | length 24.5
  Top Layer w0.254: v1(14.6,28.6) 14.8,28.8 v1(14.8,38)
  Bottom Layer w0.254: R36.1 8.998,38.781 14.019,38.781 v1(14.8,38) ; v1(14.6,28.6) 15.572,27.628 DD1.42
NetDD1_43: DD1.43 R37.1 | length 26.6
  Top Layer w0.254: v1(21.2,31.672) v1(21.2,40.9)
  Bottom Layer w0.254: R37.1 9.059,40.466 10.02,39.505 12.859,39.505 14.019,40.665 18.553,40.665 18.788,40.9 v1(21.2,40.9) ; v1(21.2,31.672) DD1.43
NetDD1_46: DD1.46 R26.1 | length 34.3
  Top Layer w0.254: v1(14.7,19.05) 15.611,19.961 15.611,22.541 15.67,22.6 15.67,27.754 17.781,29.865 17.781,33.219 v1(17.7,33.3)
  Bottom Layer w0.254: R26.1 13.431,17.781 v1(14.7,19.05) ; v1(17.7,33.3) 18.281,33.881 24.065,33.881 25.211,32.735 25.211,32.059 25.324,31.945 25.324,31.308 25.246,31.23 25.246,29.126 DD1.46
NetDD1_47: DD1.47 R27.1 | length 41.2
  Top Layer w0.254: v1(16.065,15.55) 16.065,22.353 16.124,22.412 16.124,27.566 18.581,30.023 18.581,34.423 v1(17.904,35.1)
  Bottom Layer w0.254: R27.1 15.644,15.531 15.663,15.55 v1(16.065,15.55) v1@16.065,15.39 ; v1(17.904,35.1) 18.669,34.335 24.253,34.335 25.665,32.923 25.665,32.247 25.778,32.133 25.778,30.783 25.747,30.753 DD1.47
NetDD1_48: DD1.48 R30.1 | length 36.1
  Top Layer w0.254: v1(10.4,24.6) 10.165,24.835 10.165,27.619 10.181,27.635 10.181,36.281 v1(10.4,36.5)
  Bottom Layer w0.254: R30.1 8.432,24.6 v1(10.4,24.6) ; v1(10.4,36.5) 10.681,36.219 11.965,36.219 12.227,36.481 13.789,36.481 14.62,35.65 16.18,35.65 16.934,36.404 22.35,36.404 23.335,35.419 23.811,35.419 26.119,33.111 26.119,32.435 26.247,32.306 DD1.48
NetDD1_50: DD1.50 R28.1 | length 43.4
  Top Layer w0.254: v1(11.2,20.1) 11.2,24.154 11.281,24.235 11.281,25.731 10.619,26.393 10.619,27.431 10.635,27.447 10.635,35.489 11.6,36.454 v1(11.6,37.1)
  Bottom Layer w0.254: R28.1 8.458,20 11.1,20 v1(11.2,20.1) ; v1(11.6,37.1) 11.681,37.019 13.893,37.019 14.247,36.665 15.353,36.665 15.5,36.812 15.547,36.765 16.653,36.765 17.069,37.181 24.065,37.181 27.881,33.365 27.881,32.323 27.477,31.919 27.477,31.261 27.247,31.032 DD1.50
NetDD1_51: DD1.51 R32.1 | length 35.8
  Top Layer w0.254: v1(12,29.2) 11.9,29.2 11.2,29.9 11.2,34.005 12.519,35.324 12.519,37.519 v1(12.9,37.9)
  Bottom Layer w0.254: R32.1 11.921,29.121 v1(12,29.2) ; v1(12.9,37.9) 13.654,37.9 14.435,37.119 15.165,37.119 15.312,37.266 15.688,37.266 15.735,37.219 16.465,37.219 16.881,37.635 24.253,37.635 28.335,33.553 28.335,32.047 27.931,31.643 27.931,31.073 27.748,30.889 DD1.51
NetDD1_52: DD1.52 R29.1 | length 42
  Top Layer w0.254: v1(14.7,22.3) 15.216,22.816 15.216,27.942 15.781,28.507 15.781,37.781 v1(16.1,38.1)
  Bottom Layer w0.254: R29.1 8.427,22.3 v1(14.7,22.3) ; v1(16.1,38.1) 16.111,38.089 24.441,38.089 28.789,33.741 28.789,31.859 28.385,31.455 28.385,30.885 28.248,30.747 DD1.52
NetDD1_53: DD1.53 R33.1 | length 35.4
  Top Layer w0.254: v1(16.9,31.4) 16.819,31.481 16.819,35.261 17.2,35.642 v1(17.2,39)
  Bottom Layer w0.254: R33.1 16.89,31.39 v1(16.9,31.4) ; v1(17.2,39) 17.657,38.543 24.629,38.543 29.243,33.929 29.243,31.671 28.839,31.267 28.839,30.697 28.746,30.604 28.746,29.126 DD1.53
NetDD1_54: DD1.54 J3.1 R15.1 | length 42.1
  Top Layer w0.254: v1(29.8,34.7) 29.923,34.823 v1(29.923,47.677)
  Bottom Layer w0.254: R15.1 11.036,45 J3.1 ; J3.1@11.678,44.496 14.205,47.023 17,47.023 17.25,47.273 29.519,47.273 v1(29.923,47.677) ; DD1.54 29.248,30.454 29.243,30.459 29.293,30.509 29.293,31.079 29.719,31.505 29.719,34.619 v1(29.8,34.7)
NetJ4_1: J4.1 R3.1 X3.1 | length 26.9
  Bottom Layer w0.5: R3.1 43.75,56.5 44.75,55.5 X3.1 52,55.5 63,44.5 J4.1
NetJ5_1: J5.1 R12.1 X4.1 | length 37.5
  Top Layer w0.5: X4.1 51,32 J5.1
  Bottom Layer w0.5: R12.1 45,29.48 X4.1
NetL8_1: L8.1 L10.1 R21.2 | length 6
  Bottom Layer w0.5: L8.1 13.5,65 ; R21.2 13.5,65 ; L10.1 13.5,65
NetR23_1: R23.1 VD1.2 | length 4.2
  Bottom Layer w0.254: R23.1 12.542,13.306 VD1.2
P0_115: R34.2 X1.20 | length 5.2
  Bottom Layer w0.254: X1.20 3.657,33.975 5.852,33.975 6.227,33.6 6.825,33.6 6.825,33.648 R34.2
P1_119: R35.2 X1.19 | length 2.2
  Bottom Layer w0.254: X1.19 5.65,35.928 R35.2
P2_121: R36.2 X1.21 | length 2
  Bottom Layer w0.254: X1.21 5.379,38.197 R36.2
P3_120: R37.2 X1.22 | length 5.7
  Bottom Layer w0.254: X1.22 2.407,37.982 3.475,39.05 5.398,39.05 R37.2
SCLK__105: R30.2 X1.11 | length 2.1
  Bottom Layer w0.254: X1.11 5.43,24.582 R30.2
SDIO1_112: R32.2 X1.15 | length 2.3
  Bottom Layer w0.254: X1.15 5.971,29.121 R32.2
SDIO3_114: R33.2 X1.17 | length 2.4
  Bottom Layer w0.254: X1.17 6.242,31.39 R33.2
SDIO_0_100: R28.2 X1.7 | length 1.9
  Bottom Layer w0.254: X1.7 5.006,20.044 R28.2
SDIO_2_103: R29.2 X1.9 | length 2
  Bottom Layer w0.254: X1.9 5.159,22.313 R29.2
SyncClk_124: R15.2 X1.24 | length 10.5
  Top Layer w0.254: X1.24 2.68,40.305 3.579,41.204 3.579,42.346 3.588,42.356 3.588,43.588 4.204,44.204 5.436,44.204 6.6,45.368 v1(6.6,46.55)
  Bottom Layer w0.254: v1@6.6,46.525 v1(6.6,46.55) 6.7,46.45 R15.2
SyncIn_125: R14.2 X1.23 | length 3.4
  Bottom Layer w0.254: X1.23 6.128,41.486 6.128,42.425 6.361,42.658 R14.2
SyncPwr_11: R16.2 X2.5 | length 19.6
  Top Layer w0.5: X2.5 10.075,73.325 v1(18.15,65.25)
  Bottom Layer w0.5: v1(18.15,65.25) 18.2,65.2 R16.2
pads on no net: DA1.1 DA1.5 DA1.8 DA2.1 DA2.5 DA2.8 DA3.8 DD1.28 DD1.32 DD1.34 DD1.38 X1.3 X1.6 X1.8 X1.10 X1.12 X1.14 X1.16 X1.18 X2.6 X2.7 X2.8 X2.9 X2.10 X2.11 X2.12 X2.13 X2.14 X2.15 X2.16 X2.17 X2.18 X2.19 X2.20 X2.21 X2.22 X2.23 X2.24 X3.0 X4.0

## Polygon pours and split planes (outlines as drawn)
GND on Bottom Layer "GND_L04_P004" (solid, remove dead copper, pour order 4): 60.5,91.5 60.5,77.5 22.5,77.5 22.5,91.5 0.5,91.5 0.5,0.5 70.5,0.5 70.5,91.5
no net on Bottom Layer "NONET_L04_P002" (solid, remove dead copper, pour order 2): 60.5,91.5
GND on Top Layer "GND_L01_P006" (solid, remove dead copper, pour order 6): 60.5,91.5 60.5,77.5 22.5,77.5 22.5,91.5 0.5,91.5 0.5,0.5 70.5,0.5 70.5,91.5
GND on Signal Layer 1 "GND_L02_P008" (solid, remove dead copper, pour order 8): 60.5,91.5 60.5,77.5 22.5,77.5 22.5,91.5 0.5,91.5 0.5,0.5 70.5,0.5 70.5,91.5
GND on Signal Layer 2 "GND_L03_P010" (solid, remove dead copper, pour order 10): 60.527,91.59 60.527,77.59 22.527,77.59 22.527,91.59 0.527,91.59 0.527,0.59 70.527,0.59 70.527,91.59

## Silkscreen, mask and mechanical layers (free items; w line width, h text height)
Bottom Overlay:
  text "GND" at 51.4,42.4 h1.1
  text "GND" at 67.5,9.5 h1.1
Mechanical 3:
  lines w0.01: 0,0 71,0 71,92 60,92 60,80 60,78 23,78 23,80 23,92 0,92 0,0

## Dimensions
0,31.5 to 71,31 on Mechanical 16
66,5 to 66,87 on Mechanical 16
63,92 to 68,0 on Mechanical 16
5,5 to 66,5 on Mechanical 16

## Text inside footprints (layer, text, board x,y; h text height)
DA3: Mechanical 13 "*" at 30.17,52.56 h0.7 r270; Bottom Overlay "*" at 30.17,52.56 h0.7 r270
DD1: Mechanical 13 "*" at 30.807,27.243 h1.27; Bottom Overlay "*" at 33.497,28.378 h1.27
X1: Top Overlay "1" at 5.455,10.333 h0.7 r90; Top Overlay "28" at 1.25,47 h0.7